# EAGLE board testproject (EAGLE 9.6.2)
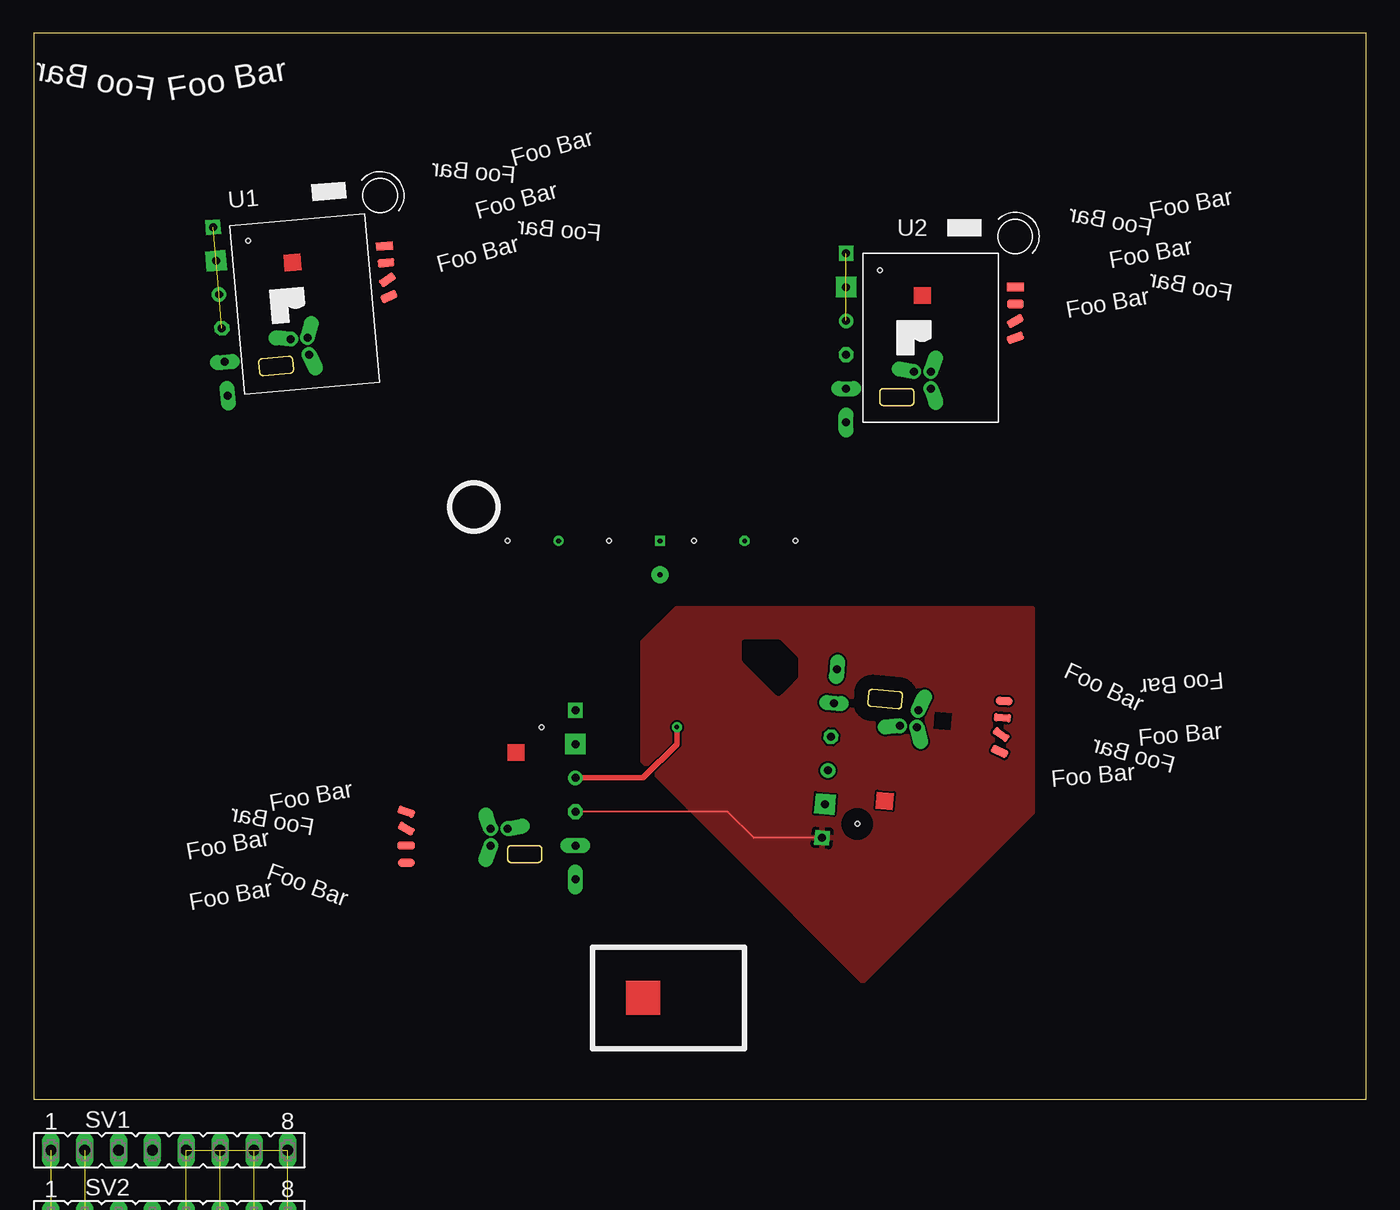
[diagram p0: board, top side]
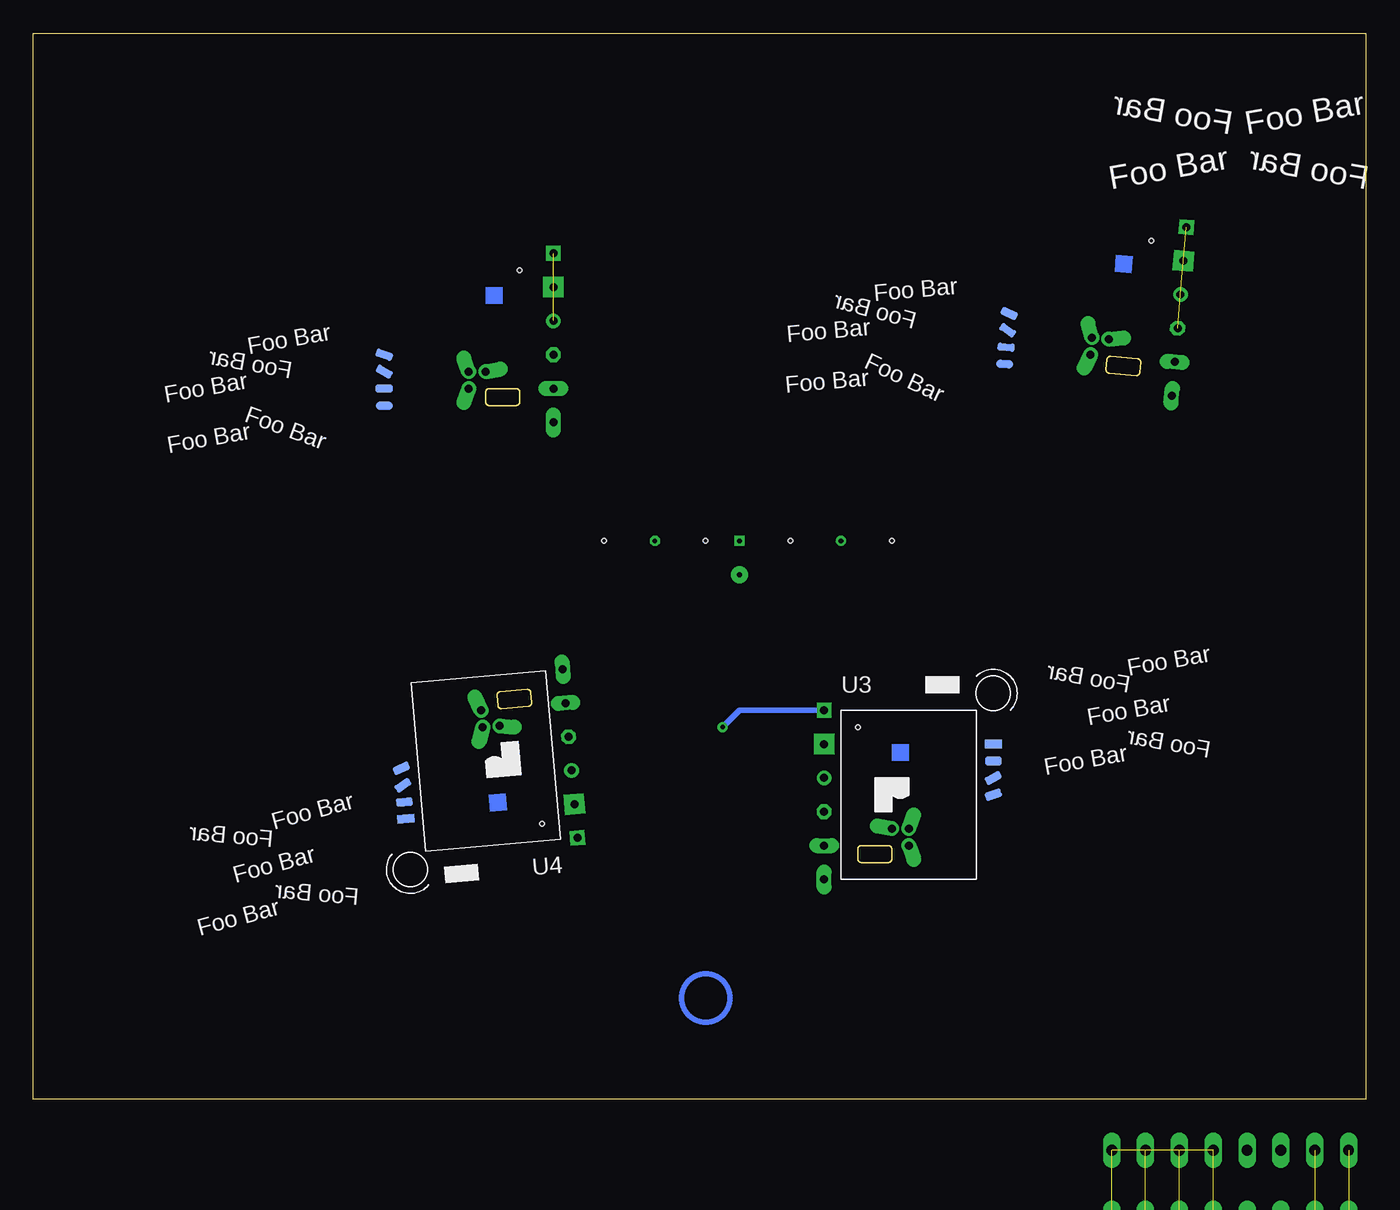
[diagram p1: board, bottom side, seen from below]

Size 100 x 80 mm. Coordinates in mm from the lower left corner, seen from the top.
Outline: 0,0 100,0 100,80 0,80 0,0
Copper layers (1*16): Top 0.035mm / dielectric 1.5mm / Bottom 0.035mm
Design rules "default": minimum track width 6mil, minimum drill 0.35mm, track to track 6mil, track to pad 6mil, pad to pad 6mil, via to via 6mil, smd to smd 6mil, copper to edge 40mil, drill to drill 6mil, minimum pad ring 10mil, minimum via ring 8mil, stop-mask expansion 4mil, vias tented up to drill 0mil, thermal gap 10mil
Holes 0.35 mm at 35.56,41.91 43.18,41.91 49.53,41.91 57.15,41.91
tRestrict: area 53.3,30.5 to 57.1,34.3

## Footprints (pad centres in the part's own frame; a part is rotated, then mirrored left to right if it is on the bottom)
FE08 = drill 0.813 long: 1 -8.89,0; 2 -6.35,0; 3 -3.81,0; 4 -1.27,0; 5 1.27,0; 6 3.81,0; 7 6.35,0; 8 8.89,0
TESTPACKAGE = drill 0.6 square: P$1 -6.35,6.35 | drill 0.6 pad 1.524 square: P$2 -6.35,3.81 | drill 0.6: P$3 -6.35,1.27 | drill 0.6 octagon: P$4 -6.35,-1.27 | drill 0.6 long: P$5 -6.35,-3.81; P$6 -6.35,-6.35 | drill 0.6 offset: P$7 0,-2.54; P$8 -1.27,-2.54; P$9 0,-3.81 | smd 1.27 x 0.635: P$10 6.35,3.81; P$11 6.35,2.54 | smd 1.27 x 0.635 rotated 30: P$12 6.35,1.27 | smd 1.27 x 0.635 rotated 200: P$13 6.35,0 | smd 1.27 x 0.635 rotated 200 bottom: P$14 6.35,-1.27 | smd 1.27 x 0.635 rotated 30 bottom: P$15 6.35,-2.54 | smd 1.27 x 0.635 bottom: P$16 6.35,-3.81; P$17 6.35,-5.08 | hole 0.35: -3.81,5.08

## Placement (x,y rotation side)
SV1  [FE08]  10.16,-3.81 0 top  (outside the outline)
SV2  [FE08]  10.16,-8.89 0 top  (outside the outline)
U1  TESTDEVICE  [TESTPACKAGE]  20.32,59.69 5 top
U2  TESTDEVICE  [TESTPACKAGE]  67.31,57.15 0 top
U3  TESTDEVICE  [TESTPACKAGE]  34.29,22.86 0 bottom
U4  TESTDEVICE  [TESTPACKAGE]  66.04,25.4 185 bottom

## Library data of the parts
SV1 SV2 = con-lsta; OC_FARNELL: unknown; OC_NEWARK: unknown
U1-U4 = librepcb

## Nets
BUSA: SV1.2 SV2.2
BUSB: SV1.1 SV2.1
DATA0: SV1.6 SV1.8 SV2.6 SV2.8
DATA1: SV1.5 SV1.7 SV2.5 SV2.7
GND: U3.P$4 U3.P$13 U3.P$16 U4.P$1
N$1: U1.P$1 U1.P$3 U1.P$4 U1.P$13 U1.P$16
N$2: U1.P$7
N$5: U4.P$4 U4.P$13 U4.P$16
NET1: U3.P$1 U3.P$3
VCC: U2.P$1 U2.P$3

## Tracks (layer width: path | path; a pad name or v marks a point on that pad's centre or on a via)
BUSA  (1 unrouted)
BUSB  (1 unrouted)
DATA0  (3 unrouted)
DATA1  (3 unrouted)
GND
  Top 0.152: U4.P$1 54.03,19.63 52.07,21.59 U3.P$4
  pour Top: 62.23,8.89 45.72,25.4 45.72,34.29 48.26,36.83 74.93,36.83 74.93,21.59
N$1  (2 unrouted)
N$3  (via drill 0.35)
  other vias: 39.37,41.91
N$4  (via drill 0.35)
  other vias: 46.99,41.91
N$6  (via drill 0.35)
  other vias: 53.34,41.91
N$7  (via drill 0.35 pad 1.27)
  other vias: 46.99,39.37
NET1  (via drill 0.35)
  Top 0.406: U3.P$3 45.72,24.13 48.26,26.67 v48.26,27.94
  Bottom 0.406: v48.26,27.94 46.99,29.21 U3.P$1
VCC  (1 unrouted)
(copper drawn outside any net)
  shapes: Bottom circle x1, Top area x1

## Text on the board
tPlace: Foo Bar | Foo Bar
bPlace: Foo Bar | Foo Bar | Foo Bar | Foo Bar